# EAGLE board jr-support_v4 (EAGLE 8.2.2), part 1 of 2
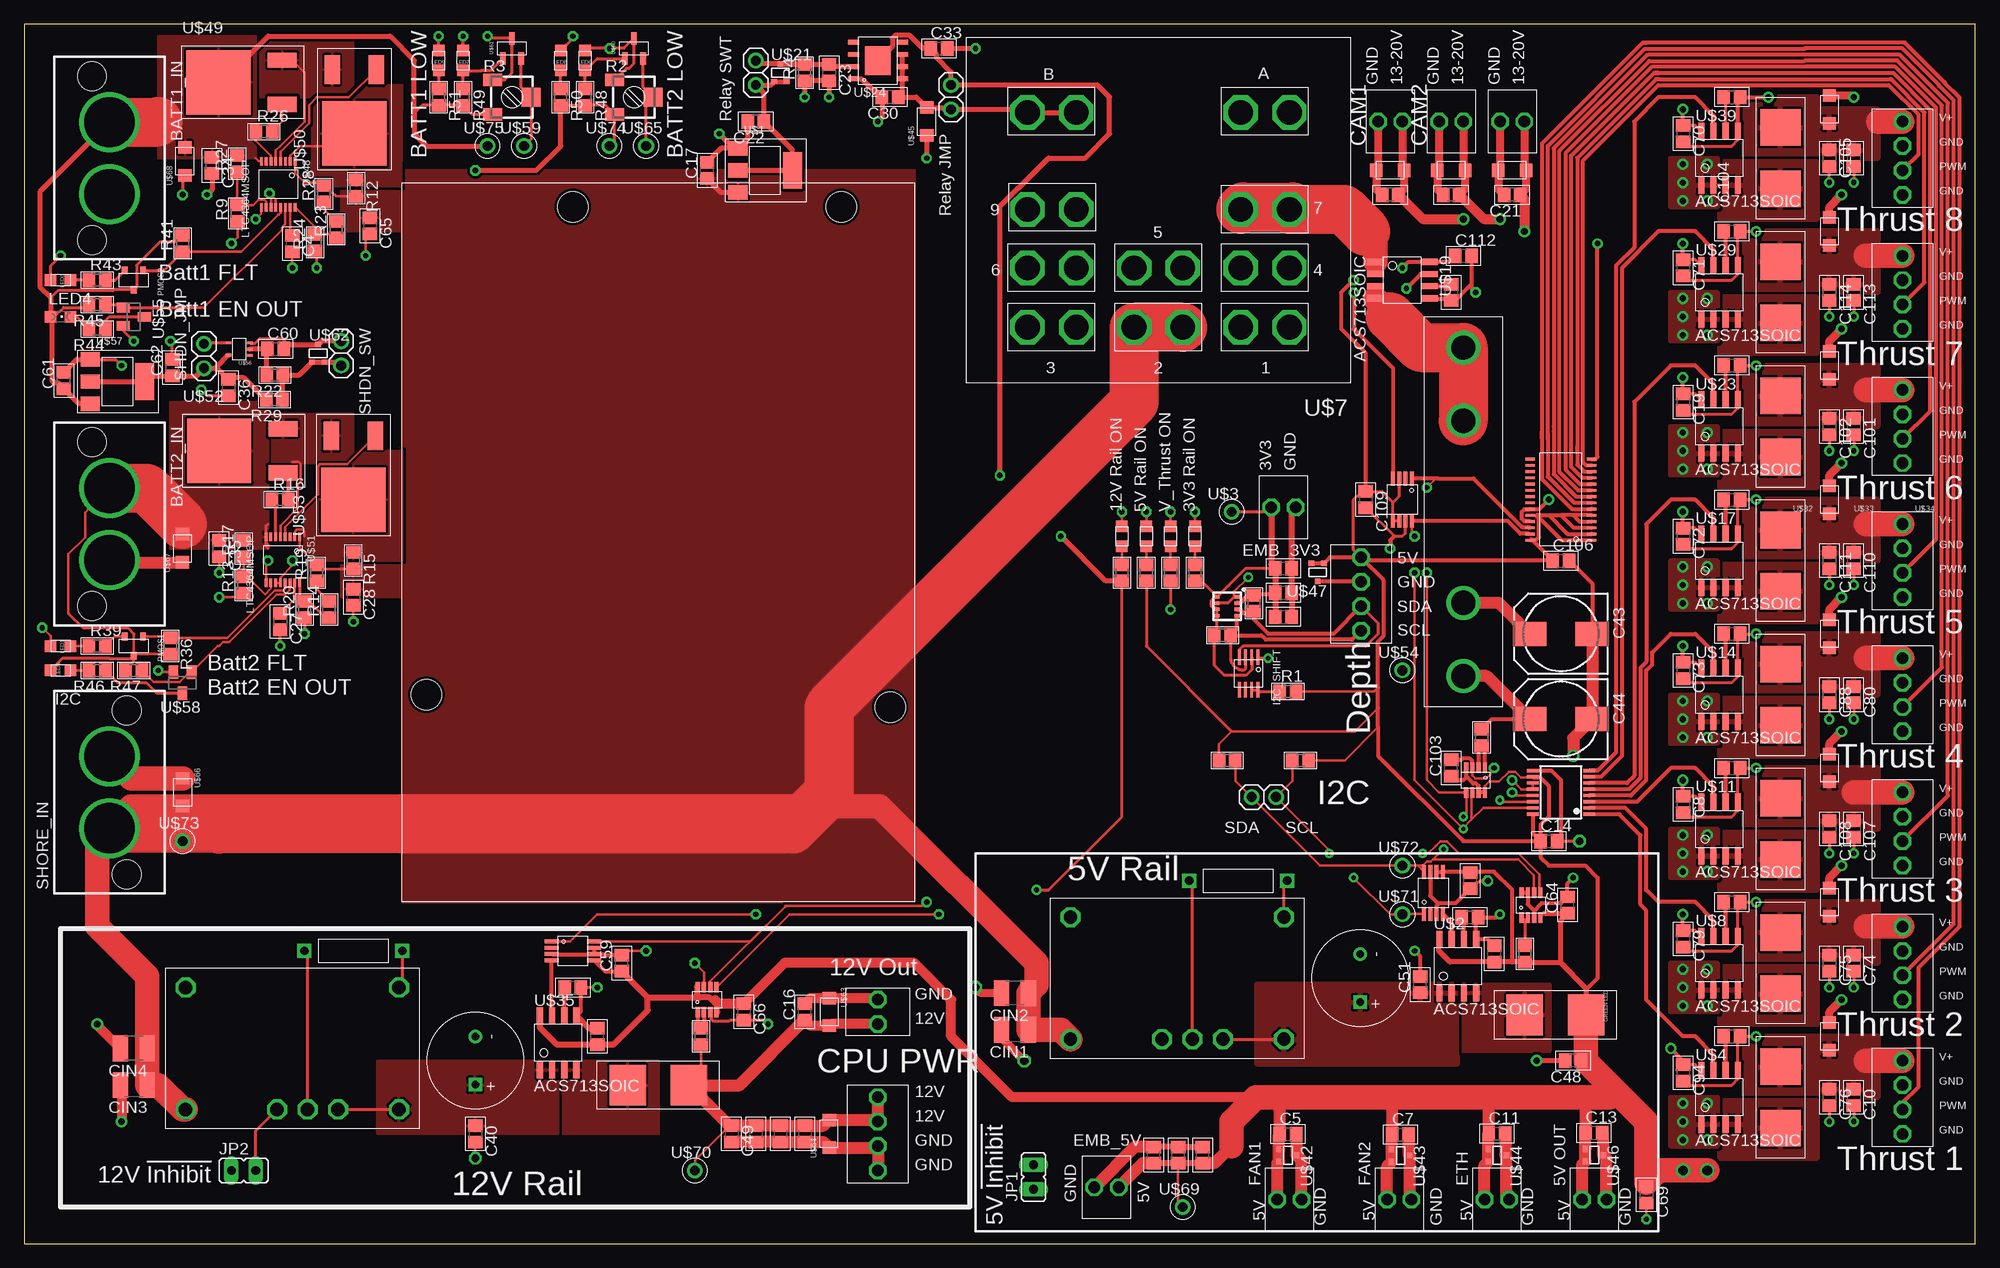
[diagram p0: board, top side]
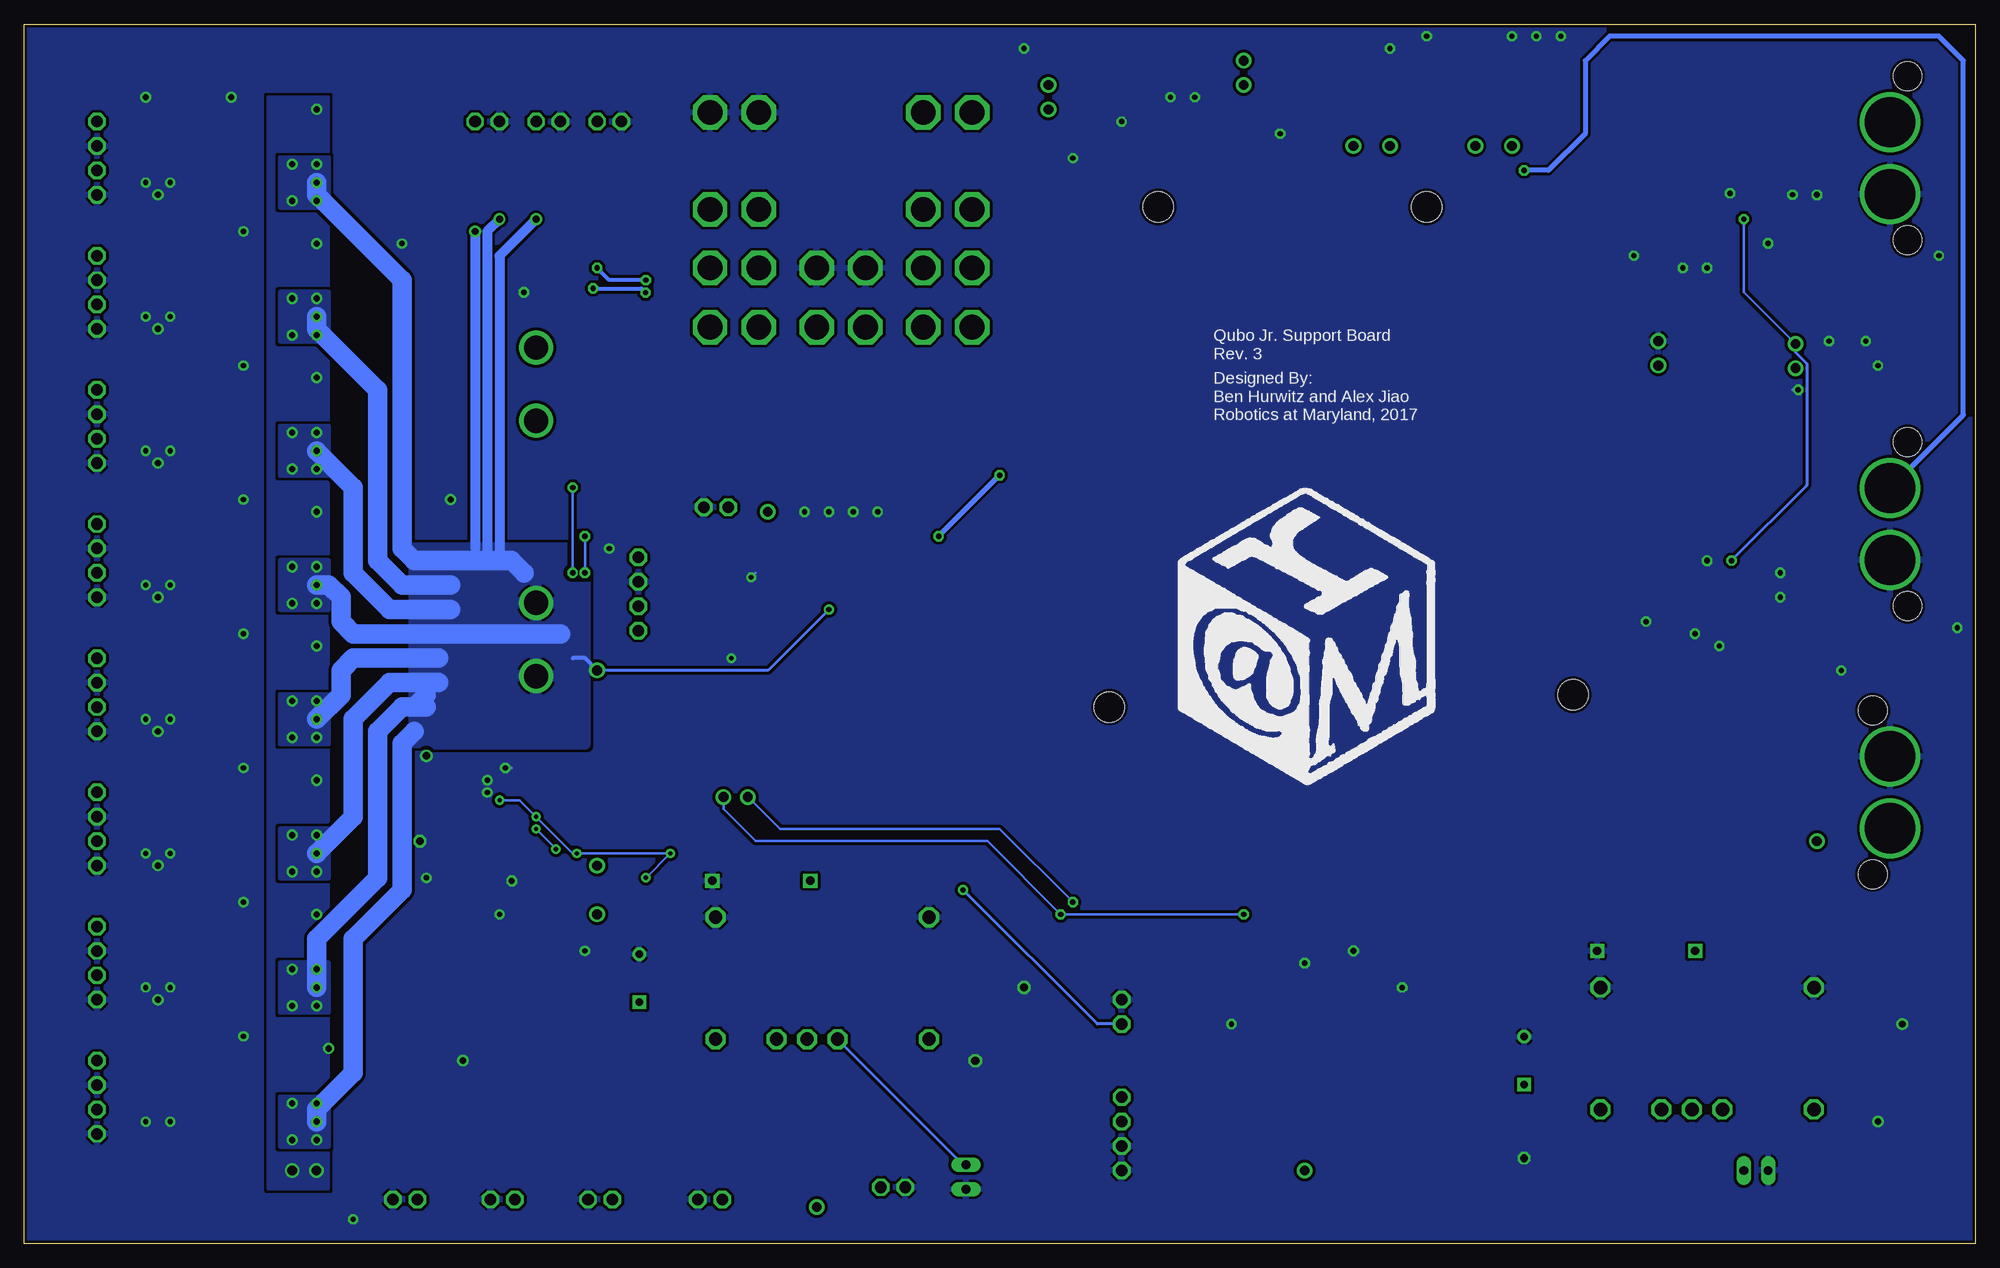
[diagram p1: board, bottom side, seen from below]

Size 203.18 x 127 mm. Coordinates in mm from the lower left corner, seen from the top.
Outline: 0,0 203.18,0 203.18,127 0,127 0,0
Copper layers (1*16): Top 0.035mm / dielectric 1.5mm / Bottom 0.035mm
Design rules "SparkFun *": minimum track width 8mil, minimum drill 16mil, track to track 8mil, track to pad 8mil, pad to pad 8mil, via to via 8mil, smd to smd 8mil, copper to edge 8mil, drill to drill 8mil, minimum pad ring 12mil, minimum via ring 10mil, stop-mask expansion 4mil, vias tented up to drill 24mil, thermal gap 10mil

## Footprints (pad centres in the part's own frame; a part is rotated, then mirrored left to right if it is on the bottom)
KK254_VERT_2PIN = drill 1.2 octagon: P$1 1.27,0; P$2 -1.27,0
0805 = smd 1.2 x 1.2: P$1 -1.05,0; P$2 1.05,0
VSSOP-8 = smd 0.42 x 1.45: P$1 -0.975,-2.2; P$2 -0.325,-2.2; P$3 0.325,-2.2; P$4 0.975,-2.2; P$5 0.975,2.2; P$6 0.325,2.2; P$7 -0.325,2.2; P$8 -0.975,2.2
SOT-23-8 = smd 0.45 x 1.1: P$1 -0.975,-1.3; P$2 -0.325,-1.3; P$3 0.325,-1.3; P$4 0.975,-1.3; P$5 0.975,1.3; P$6 0.325,1.3; P$7 -0.325,1.3; P$8 -0.975,1.3
SUPERSABRE_2CIRCUIT = drill 5.25: P$1 -3.747,0; P$2 3.747,0 | hole 2.997: -8.534,-1.803; 8.534,-1.803
BME280_LGA = smd 0.5 x 0.35: P$1 1.025,0.975; P$2 1.025,0.325; P$3 1.025,-0.325; P$4 1.025,-0.975; P$5 -1.025,-0.975; P$6 -1.025,-0.325; P$7 -1.025,0.325; P$8 -1.025,0.975
C0805 = smd 1.3 x 1.5: 1 -0.85,0; 2 0.85,0
CKR_D10 = drill 0.8 square: P$1 -2.5,0 | drill 0.8: P$2 2.5,0
140CLH-0810 = smd 3.5 x 2.5: + 3.25,0; - -3.25,0
C1210 = smd 1.6 x 2.7: 1 -1.4,0; 2 1.4,0
KK254_VERT_4PIN = drill 1.2 octagon: P$1 3.81,0; P$2 1.27,0; P$3 -1.27,0; P$4 -3.81,0
1X02 = drill 1.016: 1 -1.27,0; 2 1.27,0
SM8 = smd 0.3 x 1.6: P$1 -0.975,-1.7; P$2 -0.34,-1.7; P$3 0.295,-1.7; P$4 0.93,-1.7; P$5 0.93,1.7; P$6 0.295,1.7; P$7 -0.34,1.7; P$8 -0.975,1.7
JP1 = drill 0.914 long: 1 0,-1.27; 2 0,1.27
CHIPLED_0805 = smd 1.2 x 1.2: A 0,-1.05; C 0,1.05
SOT-346-3/S-MINI = smd 0.6 x 0.8: P$1 -0.95,-1; P$2 0.95,-1; P$3 0,1
R0805 = smd 1.3 x 1.5: 1 -0.85,0; 2 0.85,0
RTRIM3314J = smd 1.3 x 2: 1 -1.8,-2; 3 1.8,-2 | smd 2 x 2: 2 0,2
RC55 = drill 0.85 square: P$1 -5.1,0; P$2 5.1,0
TSSOP16 = smd 0.35 x 1.2: 1 -2.275,-2.925; 2 -1.625,-2.925; 3 -0.975,-2.925; 4 -0.325,-2.925; 5 0.325,-2.925; 6 0.975,-2.925; 7 1.625,-2.925; 8 2.275,-2.925; 9 2.275,2.925; 10 1.625,2.925; 11 0.975,2.925; 12 0.325,2.925; 13 -0.325,2.925; 14 -0.975,2.925; 15 -1.625,2.925; 16 -2.275,2.925
TSSOP-28_4MM = smd 1 x 0.3: 1 -3.2,4.225; 2 -3.2,3.575; 3 -3.2,2.925; 4 -3.2,2.275; 5 -3.2,1.625; 6 -3.2,0.975; 7 -3.2,0.325; 8 -3.2,-0.325; 9 -3.2,-0.975; 10 -3.2,-1.625; 11 -3.2,-2.275; 12 -3.2,-2.925; 13 -3.2,-3.575; 14 -3.2,-4.225; 15 3.2,-4.225; 16 3.2,-3.575; 17 3.2,-2.925; 18 3.2,-2.275; 19 3.2,-1.625; 20 3.2,-0.975; 21 3.2,-0.325; 22 3.2,0.325; 23 3.2,0.975; 24 3.2,1.625; 25 3.2,2.275; 26 3.2,2.925; 27 3.2,3.575; 28 3.2,4.225
SOT-223 = smd 1.5 x 2: P$1 -2.3,-3.15; P$2 0,-3.15; P$3 2.3,-3.15 | smd 3.8 x 2: P$4 0,2.54
ACS713-SOIC = smd 0.65 x 1.75: P$1 -1.905,-2.8; P$2 -0.635,-2.8; P$3 0.635,-2.8; P$4 1.905,-2.8; P$5 1.905,2.8; P$6 0.635,2.8; P$7 -0.635,2.8; P$8 -1.905,2.8
534-5004 = drill 1.016: P$1 0,0
1.25"_FUSECLIPS = drill 2.54: P$1 -17.107,0; P$2 -9.487,0; P$3 9.487,0; P$4 17.107,0
154-OMNI-BLOK = smd 3.81 x 4.242: P$1 -3.188,0; P$2 3.188,0
KUHP_6.35MM-QUICK-CONNECT = drill 2.57 octagon: 1A -13.64,6.17; 1B -8.56,6.17; 2A -2.54,6.17; 2B 2.54,6.17; 3A 8.56,6.17; 3B 13.64,6.17; 4A -13.64,0; 4B -8.56,0; 5A -2.54,0; 5B 2.54,0; 6A 8.56,0; 6B 13.64,0; 7A -13.64,-6.1; 7B -8.56,-6.1; 9A 8.56,-6.1; 9B 13.64,-6.1; AA -13.64,-16.18; AB -8.56,-16.18; BA 8.56,-16.18; BB 13.64,-16.18
DO-219AB = smd 1.3 x 1.4: P$1 -1.45,0; P$2 1.45,0
SOT323-R = smd 0.6 x 0.55: 1 -0.65,-0.925; 2 0.65,-0.925; 3 0,0.925
SOIC8+PAD = smd 0.5 x 1.15: 1 -1.9,2.54; 2 -0.63,2.54; 3 0.64,2.54; 4 1.91,2.54; 5 1.91,-2.54; 6 0.64,-2.54; 7 -0.63,-2.54; 8 -1.9,-2.54 | smd 3 x 2.65: PAD 0,0
PTN = drill 1.397 octagon: P$1 -11.113,6.35; P$2 -11.113,-6.35; P$3 -1.587,-6.35; P$4 1.587,-6.35; P$5 4.763,-6.35; P$6 11.113,-6.35; P$7 11.113,6.35
ARDUINO_UNO = hole 3.175: 13.97,2.54; 66.04,7.62; 15.24,50.8; 66.04,35.56
MSOP16 = smd 0.305 x 0.889: DGATE -0.25,-2.39; ENOUT -0.75,2.39; FB -1.75,2.39; FLT -0.25,2.39; GND 0.25,2.39; HGATE 0.75,-2.39; NC -0.75,-2.39; NC1 1.25,-2.39; OUT -1.75,-2.39; OV 0.75,2.39; SENSE -1.25,-2.39; SHDN 1.75,2.39; SOURCE 0.25,-2.39; TMR -1.25,2.39; UV 1.25,2.39; VCC 1.75,-2.39
DPAK = smd 3 x 1.6: 1 1.57,-2.3; 3 1.57,2.3 | smd 6.7 x 6.7: TAB -5.08,0
SOT23 = smd 1 x 1.4: 1 -0.95,-1.1; 2 0.95,-1.1; 3 0,1.1
TSSOP5 = smd 0.3 x 0.6: P$1 -0.65,-1.125; P$2 0,-1.125; P$3 0.65,-1.125; P$4 0.65,1.125; P$5 -0.62,1.125
SOT-23-3 = smd 1.3 x 0.6: P$1 -1.05,0.95; P$2 -1.05,-0.95; P$3 1.05,0

## Placement (x,y rotation side)
3V3_IN  KK254_VERT_2PIN""  [KK254_VERT_2PIN]  131.14,76.68 180 top
3V3_LED  [0805]  121.92,73.66 90 top
5V_CURR_ADC  ADC121C021  [VSSOP-8]  146.74,36.53 0 top
5V_LED  [0805]  116.84,73.66 90 top
5V_OUT  5V_OUT  [KK254_VERT_2PIN]  163.5,4.6 180 top
5V_VOLTAGE  INA219SOT23  [SOT-23-8]  156.9,35.26 0 top
12V_CURR_ADC  ADC121C021  [VSSOP-8]  57.15,30.48 270 top
12V_LED  [0805]  114.3,73.66 90 top
12V_OUT  12V_OUT  [KK254_VERT_2PIN]  88.9,24.13 270 top
12V_VOLTAGE  INA219SOT23  [SOT-23-8]  71.12,25.4 0 top
BATT1_IN  2_SUPERSABRE  [SUPERSABRE_2CIRCUIT]  8.89,113.03 270 top
BATT2_IN  2_SUPERSABRE  [SUPERSABRE_2CIRCUIT]  8.89,74.93 270 top
BME280  BME280  [BME280_LGA]  125.25,66.37 0 top
C1  0.1u  [C0805]  59.69,21.59 90 top
C2  0.1u  [C0805]  153.09,30.18 90 top
C3  47n  [C0805]  150.55,33.99 0 top
C4  0.22u  [C0805]  27.94,104.14 270 top
C5  0.1u  [C0805]  131.6,11.4 0 top
C6  47n  [C0805]  177.8,21.59 0 top
C7  0.1u  [C0805]  143.31,11.37 0 top
C8  0.1u  [C0805]  172.72,45.72 270 top
C9  47n  [C0805]  177.8,35.56 0 top
C10  0.1u  [C0805]  190.5,15.24 270 top
C11  0.1u  [C0805]  153.37,11.45 0 top
C12  47n  [C0805]  177.8,49.53 0 top
C13  0.1u  [C0805]  163.45,11.54 0 top
C14  0.1u  [C0805]  158.75,41.91 0 top
C15  47n  [C0805]  177.8,63.5 0 top
C16  0.1u  [C0805]  81.28,24.13 90 top
C17  10u  [C0805]  71.12,111.76 90 top
C18  47n  [C0805]  177.8,77.47 0 top
C19  0.1u  [C0805]  172.72,87.63 270 top
C20  47n  [C0805]  148.59,99.06 270 top
C21  0.1u  [C0805]  154.94,109.22 180 top
C22  10u  [C0805]  76.2,116.84 180 top
C23  0.1u  [C0805]  83.82,121.92 270 top
C27  0.22u  [C0805]  26.67,64.77 270 top
C28  22u  [C0805]  34.29,67.31 270 top
C29  47n  [C0805]  177.8,91.44 0 top
C30  4.7n  [C0805]  90.17,119.38 180 top
C31  47n  [C0805]  57.15,26.67 0 top
C33  0.1u  [C0805]  95.25,124.46 0 top
C34  1u  [C0805]  19.58,112.27 270 top
C35  1u  [C0805]  20.32,72.39 270 top
C36  1u  [C0805]  21.27,89.13 270 top
C37  47n  [C0805]  177.8,105.41 0 top
C38  330 uF  [CKR_D10]  46.99,19.05 90 top
C40  .1 uF  [C0805]  46.99,11.43 270 top
C43  100u  [140CLH-0810]  160.02,63.5 180 top
C44  100u  [140CLH-0810]  160.02,54.61 180 top
C45  1n  [C0805]  81.28,11.43 270 top
C46  0.1u  [C0805]  142.24,109.22 180 top
C47  0.1u  [C0805]  148.59,109.22 180 top
C48  10u  [C0805]  161.29,19.05 180 top
C49  10u  [C0805]  73.66,11.43 270 top
C50  330 uF  [CKR_D10]  139.12,27.64 90 top
C51  .1 uF  [C0805]  145.36,26.97 90 top
C53  4.7u  [C0805]  122.71,9.22 90 top
C57  47n  [C0805]  177.8,119.38 0 top
C59  0.1u  [C0805]  62.23,29.21 90 top
C60  1u  [C0805]  26.2,93.16 0 top
C61  10u  [C0805]  4.14,89.87 90 top
C62  10u  [C0805]  15.44,91.21 90 top
C64  0.1u  [C0805]  160.71,35.26 90 top
C65  22u  [C0805]  36,105.97 270 top
C66  1u  [C0805]  74.93,24.13 270 top
C69  0.1u  [C0805]  168.91,5.08 270 top
C70  0.1u  [C0805]  172.72,115.57 270 top
C71  0.1u  [C0805]  172.72,101.6 270 top
C72  0.1u  [C0805]  172.72,73.66 270 top
C73  0.1u  [C0805]  172.72,59.69 270 top
C74  0.1u  [C0805]  190.5,29.21 270 top
C75  10u  [C0805]  187.96,29.21 270 top
C76  10u  [C0805]  187.96,15.24 270 top
C77  0.1u  [C0805]  78.74,11.43 270 top
C78  4.7u  [C0805]  76.2,11.43 270 top
C79  0.1u  [C0805]  172.72,31.75 270 top
C80  0.1u  [C0805]  190.5,57.15 270 top
C81  0.1u  [C0805]  120.17,9.22 90 top
C82  1n  [C0805]  117.63,9.22 90 top
C83  4.7u  [C0805]  131.14,65.25 0 top
C84  0.1u  [C0805]  131.14,67.79 0 top
C85  1n  [C0805]  131.14,70.33 0 top
C88  10u  [C0805]  187.96,57.15 270 top
C93  1u  [C0805]  150.55,37.8 270 top
C94  0.1u  [C0805]  172.72,17.78 270 top
C101  0.1u  [C0805]  190.5,85.09 270 top
C102  10u  [C0805]  187.96,85.09 270 top
C103  0.1u  [C0805]  148.59,49.53 90 top
C104  0.1u  [C0805]  190.5,113.03 270 top
C105  10u  [C0805]  187.96,113.03 270 top
C106  0.1u  [C0805]  160.02,71.12 0 top
C107  0.1u  [C0805]  190.5,43.18 270 top
C108  10u  [C0805]  187.96,43.18 270 top
C109  0.1u  [C0805]  139.7,77.47 270 top
C110  0.1u  [C0805]  190.5,71.12 270 top
C111  10u  [C0805]  187.96,71.12 270 top
C112  0.1u  [C0805]  149.86,102.87 0 top
C113  0.1u  [C0805]  190.5,99.06 270 top
C114  10u  [C0805]  187.96,99.06 270 top
CAMERA1  KK254_VERT_2PIN""  [KK254_VERT_2PIN]  142.24,116.84 0 top
CAMERA2  KK254_VERT_2PIN""  [KK254_VERT_2PIN]  148.59,116.84 0 top
CIN1  2.2 uF  [C1210]  103.17,22.28 180 top
CIN2  2.2 uF  [C1210]  103.17,26.09 180 top
CIN3  2.2 uF  [C1210]  11.43,16.51 180 top
CIN4  2.2 uF  [C1210]  11.43,20.32 180 top
CPU_PWR  CPU PWR  [KK254_VERT_4PIN]  88.9,11.43 270 top
DEPTH_SENS  Depth Sensor  [KK254_VERT_4PIN]  139.22,67.64 270 top
EMB_5V  KK254_VERT_2PIN""  [KK254_VERT_2PIN]  112.7,5.87 0 top
ETHERNET  KK254_VERT_2PIN""  [KK254_VERT_2PIN]  143.18,4.6 180 top
FAN1  KK254_VERT_2PIN""  [KK254_VERT_2PIN]  131.75,4.6 180 top
FAN2  KK254_VERT_2PIN""  [KK254_VERT_2PIN]  153.34,4.6 180 top
I2C  [1X02]  129.08,46.51 0 top
I2C_SHIFT  [SM8]  127.48,59.36 180 top
JP1  [JP1]  105.11,6.93 0 top
JP2  [JP1]  22.86,7.62 270 top
JP3  [1X02]  76.2,121.92 270 top
JP4  [1X02]  96.52,119.38 270 top
LED1  Red  [0805]  3.81,62.23 180 top
LED3  Red  [0805]  3.81,100.33 180 top
LED4  Green  [CHIPLED_0805]  3.81,96.52 270 top
LED5  Green  [0805]  3.81,59.69 0 top
LED6  Yellow  [0805]  58.42,123.19 90 top
LED7  Yellow  [0805]  45.72,123.19 90 top
LED8  Green  [0805]  55.88,123.19 90 top
LED9  Green  [0805]  43.18,123.19 90 top
PMOS1  SSM3J353F  [SOT-346-3/S-MINI]  11.43,62.23 180 top
PMOS2  SSM3J353F  [SOT-346-3/S-MINI]  11.43,100.33 180 top
R1  200k  [R0805]  131.6,57.48 0 top
R2  [RTRIM3314J]  63.5,119.38 270 top
R3  [RTRIM3314J]  50.8,119.38 270 top
R4  10k  [R0805]  81.28,121.92 90 top
R5  21kO  [RC55]  126.42,37.8 0 top
R6  2.61kO  [RC55]  34.29,30.48 0 top
R7  4.7k  [R0805]  125.27,50.32 180 top
R8  4.7k  [R0805]  132.89,50.32 0 top
R9  12k  [R0805]  22.22,107.29 90 top
R10  4.3k  [R0805]  128.04,66.67 90 top
R11  4.3k  [R0805]  124.79,63.35 180 top
R12  5m  [R0805]  34.57,109.91 270 top
R13  20.8k  [R0805]  22.86,68.58 90 top
R14  51k  [R0805]  31.75,66.04 90 top
R15  5m  [R0805]  34.29,71.12 270 top
R16  10\  [R0805]  26.67,77.47 0 top
R17  200k  [R0805]  22.86,72.39 90 top
R19  8.2k  [R0805]  30.48,69.85 90 top
R20  5.1k  [R0805]  29.21,66.04 90 top
R22  510  [R0805]  26.13,90.45 180 top
R23  51k  [R0805]  32.51,105.6 90 top
R24  5.1k  [R0805]  30.3,104.25 90 top
R25  10  [R0805]  70.48,21.59 90 top
R26  10\  [R0805]  24.99,115.8 0 top
R27  200k  [R0805]  22.2,112.45 90 top
R28  8.2k  [R0805]  31.22,109.32 90 top
R29  6.8k  [R0805]  26.08,87.89 180 top
R30  10  [R0805]  151.76,52.7 270 top
R31  270  [R0805]  116.84,69.85 270 top
R32  1.5k  [R0805]  119.38,69.85 270 top
R33  1.2k  [R0805]  114.3,69.85 270 top
R34  68  [R0805]  121.92,69.85 270 top
R35  10  [R0805]  156.26,30.18 90 top
R36  1MO  [R0805]  15.24,62.23 270 top
R39  ~3k  [R0805]  7.62,62.23 0 top
R41  1MO  [R0805]  16.51,104.14 90 top
R43  ~3k  [R0805]  7.62,100.33 0 top
R44  1.2k  [R0805]  7.62,95.25 180 top
R45  1MO  [R0805]  7.62,97.79 180 top
R46  1.2k  [R0805]  7.62,59.69 180 top
R47  1MO  [R0805]  11.43,59.69 180 top
R48  330  [R0805]  58.42,119.38 270 top
R49  330  [R0805]  45.72,119.38 270 top
R50  1.5k  [R0805]  55.88,119.38 270 top
R51  1.5k  [R0805]  43.18,119.38 270 top
SHDN_JMP  [1X02]  18.75,92.43 90 top
SHDN_SW  [1X02]  33.02,92.71 270 top
SHORE_IN  2_SUPERSABRE  [SUPERSABRE_2CIRCUIT]  8.89,46.99 90 top
THRUST1  KK254_VERT_4PIN22-29-2041  [KK254_VERT_4PIN]  195.58,15.24 270 top
THRUST2  KK254_VERT_4PIN22-29-2041  [KK254_VERT_4PIN]  195.58,29.21 270 top
THRUST3  KK254_VERT_4PIN22-29-2041  [KK254_VERT_4PIN]  195.58,43.18 270 top
THRUST4  KK254_VERT_4PIN22-29-2041  [KK254_VERT_4PIN]  195.58,57.15 270 top
THRUST5  KK254_VERT_4PIN22-29-2041  [KK254_VERT_4PIN]  195.58,71.12 270 top
THRUST6  KK254_VERT_4PIN22-29-2041  [KK254_VERT_4PIN]  195.58,85.09 270 top
THRUST7  KK254_VERT_4PIN22-29-2041  [KK254_VERT_4PIN]  195.58,99.06 270 top
THRUST8  KK254_VERT_4PIN22-29-2041  [KK254_VERT_4PIN]  195.58,113.03 270 top
THRUSTER_CURR_ADC  ADS7828  [TSSOP16]  160.02,46.99 90 top
U1  PCA9685  [TSSOP-28_4MM]  160.02,77.47 180 top
U$1  NCP1117  [SOT-223]  77.47,111.76 270 top
U$2  ACS713SOIC  [ACS713-SOIC]  149.28,28.91 0 top
U$3  TEST_PT534-5004  [534-5004]  125.73,76.2 0 top
U$4  ACS713SOIC  [ACS713-SOIC]  176.53,15.24 0 top
U$5  25A Fuse  [1.25"_FUSECLIPS]  149.86,76.2 270 top
U$6  4A Fuse  [154-OMNI-BLOK]  182.88,15.24 90 top
U$7  KUHP-5XX1-XX  [KUHP_6.35MM-QUICK-CONNECT]  118.11,101.6 180 top
U$8  ACS713SOIC  [ACS713-SOIC]  176.53,29.21 0 top
U$9  4A Fuse  [154-OMNI-BLOK]  182.88,29.21 90 top
U$10  VTVSDO-219AB  [DO-219AB]  187.96,118.11 270 top
U$11  ACS713SOIC  [ACS713-SOIC]  176.53,43.18 0 top
U$12  4A Fuse  [154-OMNI-BLOK]  182.88,43.18 90 top
U$13  VTVSDO-219AB  [DO-219AB]  187.96,91.44 270 top
U$14  ACS713SOIC  [ACS713-SOIC]  176.53,57.15 0 top
U$15  4A Fuse  [154-OMNI-BLOK]  182.88,57.15 90 top
U$16  VTVSDO-219AB  [DO-219AB]  187.96,105.41 270 top
U$17  ACS713SOIC  [ACS713-SOIC]  176.53,71.12 0 top
U$18  4A Fuse  [154-OMNI-BLOK]  182.88,71.12 90 top
U$19  ACS713SOIC  [ACS713-SOIC]  143.51,100.33 270 top
U$20  4A Fuse  [154-OMNI-BLOK]  159.44,23.83 0 top
U$21  VTVSSOT323  [SOT323-R]  78.74,121.92 0 top
U$22  VTVSDO-219AB  [DO-219AB]  187.96,77.47 270 top
U$23  ACS713SOIC  [ACS713-SOIC]  176.53,85.09 0 top
U$24  BTS5090-1EJA  [SOIC8+PAD]  88.9,123.19 90 top
U$25  PTN78020  [PTN]  120.07,27.64 0 top
U$26  VTVSDO-219AB  [DO-219AB]  187.96,49.53 270 top
U$27  4A Fuse  [154-OMNI-BLOK]  182.88,85.09 90 top
U$28  VTVSDO-219AB  [DO-219AB]  187.96,63.5 270 top
U$29  ACS713SOIC  [ACS713-SOIC]  176.53,99.06 0 top
U$30  VTVSDO-219AB  [DO-219AB]  187.96,35.56 270 top
U$31  VTVSDO-219AB  [DO-219AB]  187.96,21.59 270 top
U$32  VTVSDO-219AB  [DO-219AB]  142.24,111.76 0 top
U$33  VTVSDO-219AB  [DO-219AB]  148.59,111.76 0 top
U$34  VTVSDO-219AB  [DO-219AB]  154.94,111.76 0 top
U$35  ACS713SOIC  [ACS713-SOIC]  55.62,20.91 0 top
U$36  4A Fuse  [154-OMNI-BLOK]  66.04,16.51 0 top
U$37  4A Fuse  [154-OMNI-BLOK]  182.88,99.06 90 top
U$38  ARDUINO_UNO  [ARDUINO_UNO]  92.71,41.91 90 top
U$39  ACS713SOIC  [ACS713-SOIC]  176.53,113.03 0 top
U$40  4A Fuse  [154-OMNI-BLOK]  182.88,113.03 90 top
U$41  PTN78020  [PTN]  27.94,20.32 0 top
U$42  VTVSSOT323  [SOT323-R]  131.59,9.19 270 top
U$43  VTVSSOT323  [SOT323-R]  143.33,9.18 270 top
U$44  VTVSSOT323  [SOT323-R]  153.38,9.2 270 top
U$45  VTVSDO-219AB  [DO-219AB]  93.98,116.84 90 top
U$46  VTVSSOT323  [SOT323-R]  163.49,9.23 270 top
U$47  VTVSSOT323  [SOT323-R]  134.68,69.91 180 top
U$48  LTC4364MSOP  [MSOP16]  26.47,110.31 180 top
U$49  STD95N2LH5  [DPAK]  25.32,120.93 0 top
U$50  STD95N2LH5  [DPAK]  34.39,120.68 90 top
U$51  LTC4364MSOP  [MSOP16]  26.95,71.2 180 top
U$52  STD95N2LH5  [DPAK]  25.4,82.55 0 top
U$53  STD95N2LH5  [DPAK]  34.29,82.55 90 top
U$54  TEST_PT534-5004  [534-5004]  143.51,59.69 0 top
U$55  BSS138CT-NDSOT23  [SOT23]  11.43,96.52 270 top
U$56  74LVC1G14  [TSSOP5]  22.4,93.14 90 top
U$57  NCP1117  [SOT-223]  10.03,89.76 270 top
U$58  BSS138CT-NDSOT23  [SOT23]  16.51,58.42 180 top
U$59  TEST_PT534-5004  [534-5004]  52.07,114.3 0 top
U$60  TL431DBZ  [SOT-23-3]  63.5,124.46 90 top
U$61  TL431DBZ  [SOT-23-3]  50.8,124.46 90 top
U$62  VTVSSOT323  [SOT323-R]  30.63,92.71 0 top
U$63  VTVSDO-219AB  [DO-219AB]  83.82,24.13 270 top
U$64  VTVSDO-219AB  [DO-219AB]  83.82,11.43 90 top
U$65  TEST_PT534-5004  [534-5004]  64.77,114.3 0 top
U$66  VTVSDO-219AB  [DO-219AB]  16.51,46.99 270 top
U$67  VTVSDO-219AB  [DO-219AB]  16.51,72.39 90 top
U$68  VTVSDO-219AB  [DO-219AB]  16.76,112.7 90 top
U$69  TEST_PT534-5004  [534-5004]  120.65,3.81 0 top
U$70  TEST_PT534-5004  [534-5004]  69.85,7.62 0 top
U$71  TEST_PT534-5004  [534-5004]  143.51,34.29 0 top
U$72  TEST_PT534-5004  [534-5004]  143.51,39.37 0 top
U$73  TEST_PT534-5004  [534-5004]  16.51,41.91 0 top
U$74  TEST_PT534-5004  [534-5004]  60.96,114.3 0 top
U$75  TEST_PT534-5004  [534-5004]  48.26,114.3 0 top
V-THRUST_CURR_ADC  ADC121C021  [VSSOP-8]  143.51,77.47 180 top
V-THRUST_LED  [0805]  119.38,73.66 90 top
V-THRUST_OUT  Vin_OUT  [KK254_VERT_2PIN]  154.94,116.84 0 top
V-THRUST_VOLTAGE  INA219SOT23  [SOT-23-8]  151.13,48.26 180 top

## Library data of the parts
3V3_IN 5V_OUT 12V_OUT BATT1_IN BATT2_IN CAMERA1 CAMERA2 CPU_PWR DEPTH_SENS EMB_5V ETHERNET FAN1 FAN2 SHORE_IN THRUST1-THRUST8 V-THRUST_OUT = molex
3V3_LED 5V_LED 12V_LED LED1 LED3-LED9 V-THRUST_LED = led
5V_CURR_ADC 5V_VOLTAGE 12V_CURR_ADC 12V_VOLTAGE I2C_SHIFT THRUSTER_CURR_ADC U$25 U$41 U$60 U$61 V-THRUST_CURR_ADC V-THRUST_VOLTAGE = texas
BME280 = BME280ComponentLibrary; PROD_ID: IC-13090
C1-C23 C27-C31 C33-C38 C40 C43-C51 C53 C57 C59-C62 C64-C66 C69-C85 C88 C93 C94 C101-C114 CIN1-CIN4 R1-R17 R19 R20 R22-R36 R39 R41 R43-R51 U$3 U$54 U$59 U$65 U$69-U$75 = resistor
I2C JP3 JP4 SHDN_JMP SHDN_SW = pinhead
JP1 JP2 = jumper
PMOS1 PMOS2 U$49 U$50 U$52 U$53 = transistors
U1 = NXP; PROD_ID: IC-12240
U$1 U$57 = ONSemi
U$2 U$4 U$8 U$11 U$14 U$17 U$19 U$23 U$29 U$35 U$39 = allegro
U$5 U$6 U$9 U$12 U$15 U$18 U$20 U$27 U$36 U$37 U$40 = littelfuse
U$7 = TE
U$10 U$13 U$16 U$21 U$22 U$26 U$28 U$30-U$34 U$42-U$47 U$62-U$64 U$66-U$68 = diode
U$24 = switches
U$38 = nonelectrical_mounting
U$48 U$51 = linear
U$55 U$58 = transistor-fet
U$56 = NXP

## Nets
5V: C36.1 C62.1 R29.2 SHDN_JMP.1 U$56.P$5 U$57.P$2 U$57.P$4
5V_CURR: C50.P$1 C51.1 U$2.P$1 U$2.P$2 U$25.P$5 U$25.P$6
5V_RELAY: C22.1 JP3.2 U$1.P$2 U$1.P$4 U$21.1 U$21.2
12V_CURR: C38.P$1 C40.1 U$35.P$1 U$35.P$2 U$41.P$5 U$41.P$6
+3V3: 3V3_IN.P$1 BME280.P$2 BME280.P$5 BME280.P$6 BME280.P$8 C83.1 C84.1 C85.1 I2C_SHIFT.P$2 R10.2 R11.2 R34.2 U$3.P$1
+5V: 5V_CURR_ADC.P$5 5V_CURR_ADC.P$6 5V_OUT.P$1 5V_VOLTAGE.P$4 12V_CURR_ADC.P$5 12V_VOLTAGE.P$4 12V_VOLTAGE.P$8 C1.1 C2.1 C5.1 C7.1 C8.1 C11.1 C13.1 C14.1 C19.1 C48.1 C53.1 C59.1 C64.1 C66.1 C69.1 C70.1 C71.1 C72.1 C73.1 C79.1 C81.1 C82.1 C93.1 C94.1 C103.1 C106.1 C109.1 C112.1 DEPTH_SENS.P$4 EMB_5V.P$1 ETHERNET.P$1 FAN1.P$1 FAN2.P$1 R1.2 R7.2 R8.2 R31.2 R35.1 THRUSTER_CURR_ADC.10 THRUSTER_CURR_ADC.16 U1.1 U1.2 U1.3 U1.4 U1.5 U1.24 U1.28 U$2.P$8 U$4.P$8 U$8.P$8 U$11.P$8 U$14.P$8 U$17.P$8 U$19.P$8 U$20.P$2 U$23.P$8 U$29.P$8 U$35.P$8 U$39.P$8 U$42.1 U$42.2 U$43.1 U$43.2 U$44.1 U$44.2 U$46.1 U$46.2 U$47.1 U$47.2 U$69.P$1 V-THRUST_CURR_ADC.P$3 V-THRUST_CURR_ADC.P$5 V-THRUST_CURR_ADC.P$6 V-THRUST_VOLTAGE.P$4 V-THRUST_VOLTAGE.P$7 V-THRUST_VOLTAGE.P$8
+12V: 12V_OUT.P$1 C16.1 C33.1 C45.1 C49.1 C77.1 C78.1 CPU_PWR.P$3 CPU_PWR.P$4 JP4.1 R25.1 R33.2 U$24.PAD U$36.P$2 U$63.P$2 U$64.P$2 U$70.P$1
GND: 3V3_IN.P$2 3V3_LED.P$2 5V_CURR_ADC.P$3 5V_CURR_ADC.P$7 5V_LED.P$2 5V_OUT.P$2 5V_VOLTAGE.P$3 5V_VOLTAGE.P$7 5V_VOLTAGE.P$8 12V_CURR_ADC.P$3 12V_CURR_ADC.P$6 12V_CURR_ADC.P$7 12V_LED.P$2 12V_OUT.P$2 12V_VOLTAGE.P$3 12V_VOLTAGE.P$7 BATT1_IN.P$2 BATT2_IN.P$2 BME280.P$1 BME280.P$7 C1.2 C2.2 C3.2 C4.2 C5.2 C6.2 C7.2 C8.2 C9.2 C10.2 C11.2 C12.2 C13.2 C14.2 C15.2 C16.2 C17.2 C18.2 C19.2 C20.2 C21.2 C22.2 C23.2 C27.2 C28.2 C29.2 C30.2 C31.2 C33.2 C34.2 C35.2 C36.2 C37.2 C38.P$2 C40.2 C43.- C44.- C45.2 C46.2 C47.2 C48.2 C49.2 C50.P$2 C51.2 C53.2 C57.2 C59.2 C60.2 C61.2 C62.2 C64.2 C65.2 C66.2 C69.2 C70.2 C71.2 C72.2 C73.2 C74.2 C75.2 C76.2 C77.2 C78.2 C79.2 C80.2 C81.2 C82.2 C83.2 C84.2 C85.2 C88.2 C93.2 C94.2 C101.2 C102.2 C103.2 C104.2 C105.2 C106.2 C107.2 C108.2 C109.2 C110.2 C111.2 C112.2 C113.2 C114.2 CAMERA1.P$2 CAMERA2.P$2 CIN1.2 CIN2.2 CIN3.2 CIN4.2 CPU_PWR.P$1 CPU_PWR.P$2 DEPTH_SENS.P$3 EMB_5V.P$2 ETHERNET.P$2 FAN1.P$2 FAN2.P$2 I2C_SHIFT.P$1 JP1.1 JP2.1 LED1.P$2 LED3.P$2 LED6.P$2 LED7.P$2 LED8.P$2 LED9.P$2 R2.1 R3.1 R4.1 R5.P$2 R6.P$2 R9.1 R13.1 R20.1 R24.1 SHDN_SW.1 SHORE_IN.P$2 THRUST1.P$1 THRUST1.P$3 THRUST2.P$1 THRUST2.P$3 THRUST3.P$1 THRUST3.P$3 THRUST4.P$1 THRUST4.P$3 THRUST5.P$1 THRUST5.P$3 THRUST6.P$1 THRUST6.P$3 THRUST7.P$1 THRUST7.P$3 THRUST8.P$1 THRUST8.P$3 THRUSTER_CURR_ADC.9 THRUSTER_CURR_ADC.11 THRUSTER_CURR_ADC.12 THRUSTER_CURR_ADC.13 U1.14 U1.23 U1.25 U$1.P$1 U$2.P$5 U$4.P$5 U$7.5A U$7.5B U$7.AA U$7.AB U$8.P$5 U$10.P$1 U$11.P$5 U$13.P$1 U$14.P$5 U$16.P$1 U$17.P$5 U$19.P$5 U$22.P$1 U$23.P$5 U$24.1 U$25.P$1 U$25.P$7 U$26.P$1 U$28.P$1 U$29.P$5 U$30.P$1 U$31.P$1 U$32.P$1 U$33.P$1 U$34.P$1 U$35.P$5 U$39.P$5 U$41.P$1 U$41.P$7 U$42.3 U$43.3 U$44.3 U$45.P$1 U$46.3 U$47.3 U$48.GND U$48.OV U$51.GND U$51.OV U$55.2 U$56.P$3 U$57.P$1 U$58.2 U$60.P$3 U$61.P$3 U$62.3 U$63.P$1 U$64.P$1 U$66.P$1 U$67.P$1 U$68.P$1 V-THRUST_CURR_ADC.P$7 V-THRUST_LED.P$2 V-THRUST_OUT.P$2 V-THRUST_VOLTAGE.P$3
N$1: R26.1 U$48.HGATE
N$2: LED3.P$1 R43.1
N$3: LED1.P$1 R39.1
N$4: C30.1 JP4.2 U$7.BA U$7.BB U$24.6 U$24.7 U$24.8 U$45.P$2
N$5: I2C_SHIFT.P$7 I2C_SHIFT.P$8 R1.1
N$8: JP2.2 U$41.P$3
N$9: C23.1 JP3.1 R4.2 U$21.3 U$24.2
N$10: R6.P$1 U$41.P$4
N$11: C3.1 U$2.P$6
N$12: C9.1 U$8.P$6
N$13: C6.1 U$4.P$6
N$14: JP1.2 U$25.P$3
N$15: U$4.P$3 U$4.P$4 U$6.P$1
N$16: R5.P$1 U$25.P$4
N$17: U$8.P$3 U$8.P$4 U$9.P$1
N$18: C12.1 U$11.P$6
N$19: C4.1 U$48.TMR
N$20: U$11.P$3 U$11.P$4 U$12.P$1
N$21: C15.1 U$14.P$6
N$22: R23.2 R28.1
N$23: R26.2 U$49.1
N$24: U$14.P$3 U$14.P$4 U$15.P$1
N$25: C18.1 U$17.P$6
N$26: R12.1 U$48.SENSE U$50.TAB
N$27: U$17.P$3 U$17.P$4 U$18.P$1
N$28: C29.1 U$23.P$6
N$29: U$48.DGATE U$50.1
N$30: U$23.P$3 U$23.P$4 U$27.P$1
N$31: C37.1 U$29.P$6
N$33: C20.1 U$19.P$6
N$34: U$5.P$1 U$5.P$2 U$19.P$3 U$19.P$4
N$35: R13.2 R17.1 U$51.UV
N$36: R14.1 R20.2 U$51.FB
N$37: U$29.P$3 U$29.P$4 U$37.P$1
N$38: C57.1 U$39.P$6
N$39: R9.2 R27.1 U$48.UV
N$41: R16.1 U$51.HGATE
N$42: C27.1 U$51.TMR
N$43: R14.2 R19.1
N$44: R16.2 U$52.1
N$45: U$51.SOURCE U$52.3 U$53.3
N$46: R15.1 U$51.SENSE U$53.TAB
N$47: U$39.P$3 U$39.P$4 U$40.P$1
N$48: U$51.DGATE U$53.1
N$49: 12V_VOLTAGE.P$1 12V_VOLTAGE.P$2 R25.2
N$50: R23.1 R24.2 U$48.FB
N$51: C60.1 R22.2 U$56.P$2
N$52: C31.1 U$35.P$6
N$53: U$19.P$7 V-THRUST_CURR_ADC.P$4
N$54: U$48.SOURCE U$49.3 U$50.3
N$55: U$2.P$3 U$2.P$4 U$20.P$1
N$56: U$35.P$3 U$35.P$4 U$36.P$1
N$57: 5V_CURR_ADC.P$4 U$2.P$7
N$58: R30.2 V-THRUST_VOLTAGE.P$1 V-THRUST_VOLTAGE.P$2
N$60: 12V_CURR_ADC.P$4 U$35.P$7
N$62: SHDN_JMP.2 U$48.SHDN U$51.SHDN U$56.P$4
N$64: PMOS1.P$1 R36.1 U$51.FLT
N$67: PMOS2.P$1 R41.1 U$48.FLT
N$69: R44.1 U$55.3
N$70: LED4.C R44.2
N$71: 5V_LED.P$1 R31.1
N$72: R32.1 V-THRUST_LED.P$1
N$73: 12V_LED.P$1 R33.1
N$74: 3V3_LED.P$1 R34.1
N$75: R46.1 U$58.3
N$76: LED5.P$2 R46.2
N$77: 5V_VOLTAGE.P$1 5V_VOLTAGE.P$2 R35.2
N$80: R2.2 U$60.P$2 U$65.P$1
N$81: LED6.P$1 R48.1 U$60.P$1
N$82: R3.2 U$59.P$1 U$61.P$2
N$83: LED7.P$1 R49.1 U$61.P$1
N$84: R47.1 U$51.ENOUT U$58.1
N$85: R45.1 U$48.ENOUT U$55.1
N$86: LED8.P$1 R50.1
N$87: LED9.P$1 R51.1
N$88: PMOS1.P$2 R39.2
N$89: PMOS2.P$2 R43.2
SCL: 5V_CURR_ADC.P$1 5V_VOLTAGE.P$5 12V_CURR_ADC.P$1 12V_VOLTAGE.P$5 I2C.2 R8.1 THRUSTER_CURR_ADC.14 U1.26 U$71.P$1 V-THRUST_CURR_ADC.P$1 V-THRUST_VOLTAGE.P$5
SCL1: I2C_SHIFT.P$6
SCL-3V3: BME280.P$4 DEPTH_SENS.P$1 I2C_SHIFT.P$3 R11.1
SDA: 5V_CURR_ADC.P$8 5V_VOLTAGE.P$6 12V_CURR_ADC.P$8 12V_VOLTAGE.P$6 I2C.1 R7.1 THRUSTER_CURR_ADC.15 U1.27 U$72.P$1 V-THRUST_CURR_ADC.P$8 V-THRUST_VOLTAGE.P$6
SDA1: I2C_SHIFT.P$5
SDA-3V3: BME280.P$3 DEPTH_SENS.P$2 I2C_SHIFT.P$4 R10.1
SHDN_SW: R22.1 R29.1 SHDN_SW.2 U$62.1 U$62.2
T1_CURR: THRUSTER_CURR_ADC.1 U$4.P$7
T1_PWM: THRUST1.P$2 U1.6
T2_CURR: THRUSTER_CURR_ADC.2 U$8.P$7
T2_PWM: THRUST2.P$2 U1.7
T3_CURR: THRUSTER_CURR_ADC.3 U$11.P$7
T3_PWM: THRUST3.P$2 U1.8
T4_CURR: THRUSTER_CURR_ADC.4 U$14.P$7
T4_PWM: THRUST4.P$2 U1.9
T5_CURR: THRUSTER_CURR_ADC.5 U$17.P$7
T5_PWM: THRUST5.P$2 U1.10
T6_CURR: THRUSTER_CURR_ADC.6 U$23.P$7
T6_PWM: THRUST6.P$2 U1.11
T7_CURR: THRUSTER_CURR_ADC.7 U$29.P$7
T7_PWM: THRUST7.P$2 U1.12
T8_CURR: THRUSTER_CURR_ADC.8 U$39.P$7
T8_PWM: THRUST8.P$2 U1.13
V_BATT1: BATT1_IN.P$1 C34.1 C61.1 LED4.A PMOS2.P$3 R3.3 R27.2 R41.2 R45.2 R49.2 R51.2 U$48.VCC U$49.TAB U$57.P$3 U$68.P$2 U$75.P$1
V_BATT2: BATT2_IN.P$1 C35.1 LED5.P$1 PMOS1.P$3 R2.3 R17.2 R36.2 R47.2 R48.2 R50.2 U$51.VCC U$52.TAB U$67.P$2 U$74.P$1
V_RELAY: U$7.7A U$7.7B U$19.P$1 U$19.P$2
V_THRUST: C21.1 C43.+ C44.+ C46.1 C47.1 CAMERA1.P$1 CAMERA2.P$1 R30.1 R32.2 U$4.P$1 U$4.P$2 U$5.P$3 U$5.P$4 U$8.P$1 U$8.P$2 U$11.P$1 U$11.P$2 U$14.P$1 U$14.P$2 U$17.P$1 U$17.P$2 U$23.P$1 U$23.P$2 U$29.P$1 U$29.P$2 U$32.P$2 U$33.P$2 U$34.P$2 U$39.P$1 U$39.P$2 U$54.P$1 V-THRUST_OUT.P$1
V_THRUST1: C10.1 C76.1 THRUST1.P$4 U$6.P$2 U$31.P$2
V_THRUST2: C74.1 C75.1 THRUST2.P$4 U$9.P$2 U$30.P$2
V_THRUST3: C107.1 C108.1 THRUST3.P$4 U$12.P$2 U$26.P$2
V_THRUST4: C80.1 C88.1 THRUST4.P$4 U$15.P$2 U$28.P$2
V_THRUST5: C110.1 C111.1 THRUST5.P$4 U$18.P$2 U$22.P$2
V_THRUST6: C101.1 C102.1 THRUST6.P$4 U$13.P$2 U$27.P$2
V_THRUST7: C113.1 C114.1 THRUST7.P$4 U$16.P$2 U$37.P$2
V_THRUST8: C104.1 C105.1 THRUST8.P$4 U$10.P$2 U$40.P$2
VIN: C17.1 C28.1 C65.1 CIN1.1 CIN2.1 CIN3.1 CIN4.1 R12.2 R15.2 R19.2 R28.2 SHORE_IN.P$1 U$1.P$3 U$7.2A U$7.2B U$25.P$2 U$41.P$2 U$48.OUT U$51.OUT U$66.P$2 U$73.P$1